# Altium PCB Camera-MT__Pcb.PcbDoc
Units mil, origin at the board's own origin, x right, y up, seen from the top; angles counter-clockwise.
Board outline 984.25 x 1181.1 mil, 2 copper layers (Top Layer, Bottom Layer); 21 components, 25 nets, 100 pads, 36 vias.
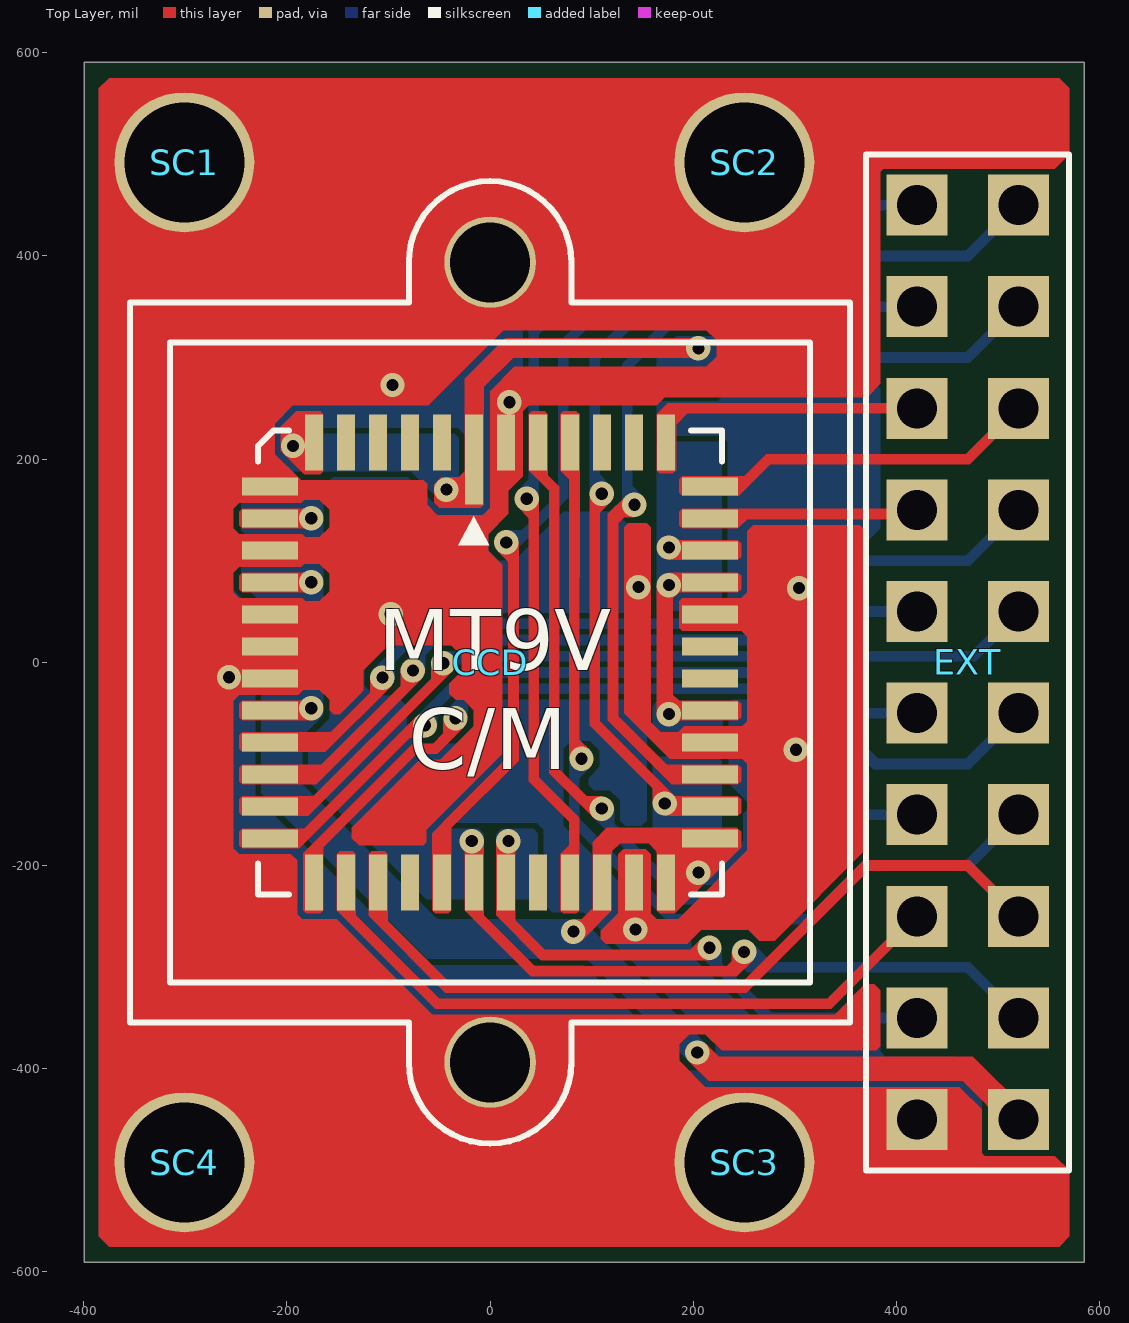
[diagram p0: Top Layer view]
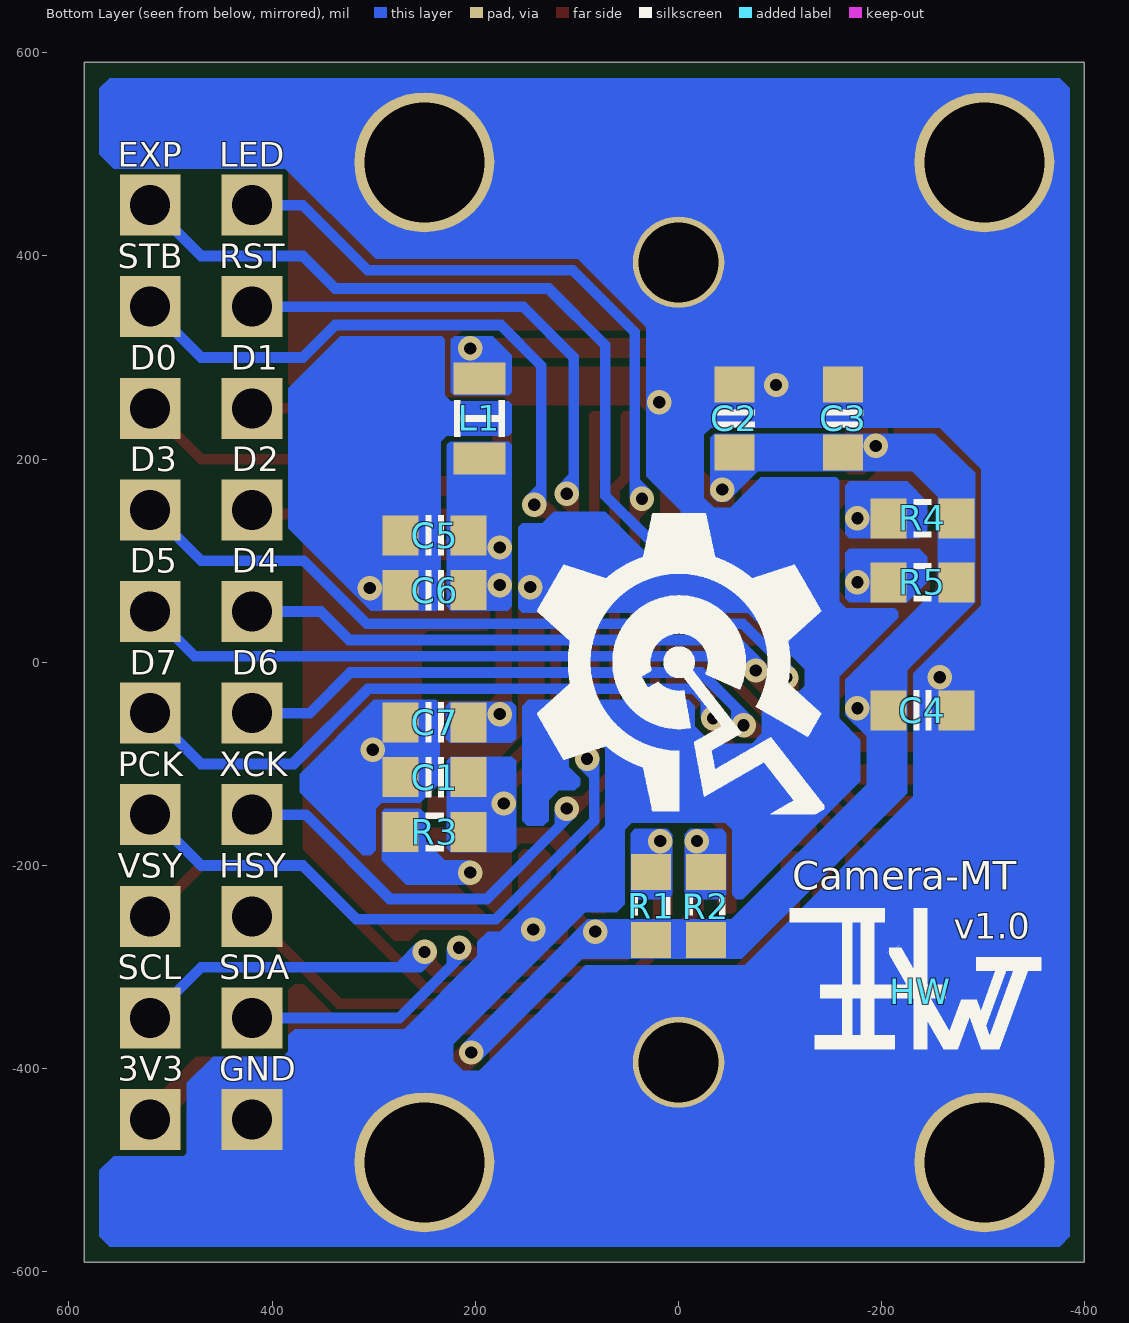
[diagram p1: Bottom Layer view, seen from below]

## Layer stack, top to bottom
Top Solder: solder mask 0.4, Solder Resist, Dk 3.5
Top Layer: signal copper 1.4
Dielectric1: dielectric 12.6, FR-4, Dk 4.8
Bottom Layer: signal copper 1.4
Bottom Solder: solder mask 0.4, Solder Resist, Dk 3.5

## Board outline
-399.37,-590.55 -399.37,590.55 584.88,590.55 584.88,-590.55

## Design rules (kind name [scope] priority, off if disabled: settings)
Clearance ClearancePolygon [InPolygon] p1: gap=8
Clearance [All] p2: gap=6
ComponentClearance [All] p1: gap=0 collisioncheckmode=3 verticalgap=0 showdistances=FALSE
HoleSize [All] p1: absolutevalues=TRUE maxlimit=150 minlimit=1 maxpercent=80.000 minpercent=20.000
HoleToHoleClearance [All] p1: gap=6 allowstackedmicrovias=TRUE
MinimumSolderMaskSliver [All] p1: minsoldermaskwidth=0
PlaneConnect [All] p1: planeconnectstyle=Direct reliefexpansion=20 reliefentries=4 reliefconductorwidth=10 reliefairgap=10
PolygonConnect [All] p1: connectstyle=Direct reliefconductorwidth=10 reliefentries=4 polygonreliefangle="90 Angle" airgapwidth=10
RoutingVias [All] p1: holewidth=12 width=24 viastyle="Through Hole" minholewidth=12 minwidth=20 maxholewidth=24 maxwidth=50
SilkToSilkClearance [All] p1: silktosilkclearance=0
SilkToSolderMaskClearance [IsPad] p1: minsilkscreentomaskgap=2 clearancetoexposedcopper=TRUE
SolderMaskExpansion [All] p1: expansion=0
Width [All] p1: maxlimit=30 minlimit=6 preferedwidth=10
22 further rules are at their usual default settings.

## Components (designator, comment, footprint, x,y, rotation, side; value= is the part's Value field where it differs from the comment)
C1 "Cap_0603" CAP_0603 240,-113 r180 bottom locked
C2 "Cap_0603" CAP_0603 -55,240 r270 bottom locked
C3 "Cap_0603" CAP_0603 -162,240 r270 bottom locked
C4 "Cap_0603" CAP_0603 -240,-47.24 r0 bottom locked
C5 "Cap_0603" CAP_0603 240,125 r180 bottom locked
C6 "Cap_0603" CAP_0603 240,71 r180 bottom locked
C7 "Cap_0603" CAP_0603 240,-59 r180 bottom locked
CCD "CCD" CCD_LENS_20MM 0,0 r90 top locked
EXT "HDR2X10_180_2.54" HDR2X10_180_2.54 520,-450 r90 top locked
HW "HW" Logo_HW_v2.0 -238,-324 r180 bottom
L1 "Ind_0805" IND_0805 196,240 r90 bottom locked
MT9V "MT9V034" CLCC_48 0,0 r0 top locked
R1 "Res_0603" RES_0603 27,-240 r90 bottom locked
R2 "Res_0603" RES_0603 -27,-240 r90 bottom locked
R3 "Res_0603" RES_0603 240,-167 r0 bottom locked
R4 "Res_0603" RES_0603 -240,141.73 r0 bottom locked
R5 "Res_0603" RES_0603 -240,78.74 r0 bottom locked
SC1 "M3" SCRREW_M3 -300.94,492.13 r0 top locked
SC2 "M3" SCRREW_M3 250.24,492.13 r0 top locked
SC3 "M3" SCRREW_M3 250.24,-492.13 r0 top locked
SC4 "M3" SCRREW_M3 -300.94,-492.13 r0 top locked

## Footprints (in the part's own frame and the unit in brackets; to place one, negate y for a bottom-side part, rotate by r counter-clockwise, add the part's x,y. Pads: shape width x height; smd on the part's side, far side on the other; paste and mask are expansions set on the pad)
CAP_0603 [mm] "Chip Capacitor, Body 1.6x0.8mm, 0603, IPC Medium Density"
  rect 0.9x1 smd: 1(-0.85,0) 2(0.85,0)
  Top Layer pour cut-out: -0.4,0.6 0.4,0.6 0.4,-0.6 -0.4,-0.6
  silkscreen extent -0.23,-0.51 0.23,0.51, body extent -0.8,-0.4 0.8,0.4, height 0.92
CCD_LENS_20MM [mil]
  round 90 hole 78.74: 0(-393.7,0) 0(393.7,0)
  silkscreen extent -474,-354 474,354
CLCC_48 [mm] "LCC, 48-Pins, Body 11.43x11.43mmx2.30mm, Pitch 0.80mm, IPC Medium Density"
  rect 0.45x2.25 smd: 1(-0.4,5.075)
  rect 0.45x1.4 smd: 2(-1.2,5.5) 3(-2,5.5) 4(-2.8,5.5) 5(-3.6,5.5) 6(-4.4,5.5) 19(-4.4,-5.5) 20(-3.6,-5.5) 21(-2.8,-5.5) 22(-2,-5.5) 23(-1.2,-5.5) 24(-0.4,-5.5) 25(0.4,-5.5) 26(1.2,-5.5) 27(2,-5.5) 28(2.8,-5.5) 29(3.6,-5.5) 30(4.4,-5.5) 43(4.4,5.5) 44(3.6,5.5) 45(2.8,5.5) 46(2,5.5) 47(1.2,5.5) 48(0.4,5.5)
  rect 1.4x0.45 smd: 7(-5.5,4.4) 8(-5.5,3.6) 9(-5.5,2.8) 10(-5.5,2) 11(-5.5,1.2) 12(-5.5,0.4) 13(-5.5,-0.4) 14(-5.5,-1.2) 15(-5.5,-2) 16(-5.5,-2.8) 17(-5.5,-3.6) 18(-5.5,-4.4) 31(5.5,-4.4) 32(5.5,-3.6) 33(5.5,-2.8) 34(5.5,-2) 35(5.5,-1.2) 36(5.5,-0.4) 37(5.5,0.4) 38(5.5,1.2) 39(5.5,2) 40(5.5,2.8) 41(5.5,3.6) 42(5.5,4.4)
  silkscreen extent -5.8,-5.8 5.8,5.8, body extent -6.35,-6.35 6.35,6.35, height 2.02
HDR2X10_180_2.54 [mil] "Connector; Header; 2x2 Position"
  rect 60x60 hole 39.37: 1(0,0) 2(0,100) 3(100,0) 4(100,100) 5(200,0) 6(200,100) 7(300,0) 8(300,100) 9(400,0) 10(400,100) 11(500,0) 12(500,100) 13(600,0) 14(600,100) 15(700,0) 16(700,100) 17(800,0) 18(800,100) 19(900,0) 20(900,100)
  silkscreen extent -50,-50 950,150, body extent -50,-50 950,150, height 298
IND_0805 [mm] "Ferrite Bead Chip, Body 2.0x1.2mm, 0805, IPC Medium Density"
  rect 0.8x1.3 smd: 1(-1,0) 2(1,0)
  Top Layer pour cut-out: -0.6,0.75 0.6,0.75 0.6,-0.75 -0.6,-0.75
  silkscreen extent -0.46,-0.64 0.46,0.64, body extent -1,-0.6 1,0.6, height 1.05
Logo_HW_v2.0 [mil]
  silkscreen extent -129,-57 119,82
RES_0603 [mm]
  rect 0.9x1 smd: 1(-0.85,0) 2(0.85,0)
  Top Layer pour cut-out: -0.4,0.6 0.4,0.6 0.4,-0.6 -0.4,-0.6
  silkscreen extent -0.23,-0.48 0.23,0.48, body extent -0.8,-0.4 0.8,0.4, height 0.5
SCRREW_M3 [mm]
  round 3.5 hole 3 mask+0: 0(0,0)

## Part data
C1 C2 C3 C4 C5 C6 C7: "Capacitor"
CCD: library part lensCCD_20
EXT: "Header"
HW: "Logo"
L1: "Inductor"
MT9V: "CMOS"
R1 R2 R3 R4 R5: "Resistor"
SC1 SC2 SC3 SC4: library part Screw_M3, "Screw"

## Via types
v1: diameter 24, hole 12, Top Layer to Bottom Layer, 36 vias

## Nets (pads, with @x,y where several pads share a name; then routed paths per layer and width w, separated by ;. In a path a pad name is that pad's centre, name@x,y a point inside that pad or via, vN(x,y) a via of type N, cw(c..) or ccw(c..) an arc to the next point about the centre after c; other vN are vias at no path point)
3V3: C2.2 C3.2 C4.2 EXT.1 L1.2 MT9V.1 MT9V.6 MT9V.14 MT9V.28 MT9V.30 MT9V.31 R1.1 R2.1 R3.2 R4.1 R5.1 | length 1066.8
  Top Layer w10: v1@-195,206.53 -183.23,206.53 ; v1@-37,171 MT9V.1@-15.75,171 ; MT9V.28 110.24,-186.76 124,-173 MT9V.31@216.54,-173
  Top Layer w17: MT9V.14 v1@-176,-47.24
  Top Layer w18: MT9V.1@-15.75,171 -15.75,274.25 19,309 v1(205,309)
  Top Layer w20: v1(204,-384) 220,-400 470,-400 EXT.1
  Bottom Layer w20: v1@84,-264 v1(204,-384)
  other v1: 82,-265 205,-207 -176,-45.24 -43,170 -194,213
3V3A: C5.2 C6.2 C7.2 L1.1 MT9V.35 MT9V.39 MT9V.40 | length 121.6
  Top Layer w17: v1@176,-47.24 MT9V.35 ; v1@176,78.74 MT9V.39 ; v1@176,110.24 MT9V.40
  other v1: 176,-51 176,76 176,113
D0: MT9V.45
D1: MT9V.44
D2: EXT.16 MT9V.43 | length 253.3
  Top Layer w10: MT9V.43@173.23,234.23 189,250 EXT.16
D3: EXT.15 MT9V.42 | length 335.3
  Top Layer w10: MT9V.42 221.31,178 252,178 274,200 470,200 EXT.15
D4: EXT.14 MT9V.41 | length 203.5
  Top Layer w10: MT9V.41@216.54,146 EXT.14@420,146
D5: EXT.13 MT9V.15 | length 843
  Top Layer w10: MT9V.15 -159.74,-78.74 -106,-25 v1(-106,-15)
  Bottom Layer w10: v1(-106,-15) -106,-5 -63,38 307,38 369,100 470,100 EXT.13
D6: EXT.12 MT9V.16 | length 714.6
  Top Layer w10: MT9V.16 -168.24,-110.24 -76,-18 v1(-76,-8)
  Bottom Layer w10: v1(-76,-8) -76,2 -56,22 324,22 352,50 EXT.12
D7: EXT.11 MT9V.17 | length 821.8
  Top Layer w10: MT9V.17 -176.73,-141.73 -46,-11 v1(-46,-1)
  Bottom Layer w10: v1(-46,-1) -39,6 476,6 EXT.11
D8: EXT.10 MT9V.18 | length 726.6
  Top Layer w10: MT9V.18 -185.23,-173.23 -74,-62 v1(-64,-62)
  Bottom Layer w10: v1(-64,-62) -64,-52 -22,-10 323,-10 363,-50 EXT.10
D9: EXT.9 MT9V.19 | length 854.2
  Top Layer w10: MT9V.19 -173.23,-184.23 -74,-85 -54,-85 -34,-65 v1(-34,-55)
  Bottom Layer w10: v1(-34,-55) -34,-45 -15,-26 305.44,-26 379.44,-100 470,-100 EXT.9
EXP: EXT.19 MT9V.23 | length 1090.5
  Top Layer w10: MT9V.23@-43,-217 -43,-161 23,-95 23,111 v1(16,118)
  Bottom Layer w10: v1@21,113 72,164 72,312 128,368 338,368 370,400 470,400 EXT.19
GND: C1.1 C2.1 C3.1 C4.1 C5.1 C6.1 C7.1 CCD.0 EXT.2 MT9V.7 MT9V.9 MT9V.11 MT9V.12 MT9V.13 MT9V.29 MT9V.34 MT9V.38 MT9V.48 SC1.0 SC2.0 SC3.0 SC4.0 | length 3374
  Top Layer w10: MT9V.11 -97.76,47.24 11,156 MT9V.48@11,217 ; v1(146,74) 146,-54 170.74,-78.74 MT9V.34
  Top Layer w17: -300.7,-15.75 MT9V.13 ; -300.7,15.75 MT9V.12 ; -300.7,47.24 MT9V.11 ; -300.7,110.24 MT9V.9 ; -300.7,173.23 MT9V.7
  Top Layer w20: 0,-492 CCD.0@0,-393.7 ; CCD.0@0,393.7 0,492 ; SC3.0 SC4.0 SC1.0 SC2.0
  Bottom Layer w10: SC3.0@292.36,-450 EXT.2
  other v1: 143,-263 301,-86 -257,-14.75 -97.76,47.49 304,73 19,256 -96,273
HSYNC: EXT.6 MT9V.20 | length 664.3
  Top Layer w10: MT9V.20 -141.73,-246.27 -52,-336 334,-336 EXT.6
LED: EXT.20 MT9V.27 | length 912.3
  Top Layer w10: 43,86 43,-115 83,-155 MT9V.27@83,-216
  Bottom Layer w10: v1@43,160 43,325 104,386 306,386 370,450 EXT.20
  other v1: 36,161
NetMT9V_8: MT9V.8 R4.2 | length 40.5
  Top Layer w17: MT9V.8 v1(-176,141.73)
NetMT9V_10: MT9V.10 R5.2 | length 40.5
  Top Layer w17: MT9V.10 v1(-176,78.74)
PCLK: EXT.7 MT9V.46 | length 897
  Top Layer w10: MT9V.46 83,212.28 83,-88 v1(90,-95)
  Bottom Layer w10: v1@83,-95 83,-156 180,-253 317,-253 370,-200 470,-200 EXT.7
RST: C1.2 EXT.18 MT9V.32 R3.1 | length 845.5
  Top Layer w10: v1@103,166 103,-60 185.73,-142.73
  Top Layer w16: 185.73,-142.73 MT9V.32@216.54,-142.73
  Bottom Layer w10: v1@103,166 103,300 153,350 EXT.18
  other v1: 172,-139 110,166
SCL: EXT.3 MT9V.24 R2.2 | length 660.6
  Top Layer w10: MT9V.24 -15.75,-246.25 42,-304 241,-304 v1@255,-290
  Top Layer w17: MT9V.24 v1@-15.75,-176
  Bottom Layer w10: v1@255,-290 265,-300 470,-300 EXT.3
  other v1: 250,-285 -18,-176
SDA: EXT.4 MT9V.25 R1.2 | length 526.5
  Top Layer w10: MT9V.25 15.75,-251.75 52,-288 v1@216,-288
  Top Layer w17: MT9V.25 v1@15.75,-176
  Bottom Layer w10: v1@211,-286 275,-350 EXT.4
  other v1: 216,-281 18,-176
STB: EXT.17 MT9V.33 | length 914.3
  Top Layer w10: v1(142,155) 134,155 121,142 121,-55 176.24,-110.24 MT9V.33
  Bottom Layer w10: v1@135,155 135,292 175,332 338,332 370,300 470,300 EXT.17
VSYNC: EXT.5 MT9V.21 | length 764.1
  Top Layer w10: MT9V.21 -110.24,-251.76 -42,-320 250,-320 370,-200 470,-200 EXT.5
XCLK: EXT.8 MT9V.47 | length 773.6
  Top Layer w10: MT9V.47 47.24,186.76 63,171 63,-107 v1@105,-149
  Bottom Layer w10: v1@105,-149 189,-233 283.56,-233 366.56,-150 EXT.8
  other v1: 110,-144
pads on no net: MT9V.2 MT9V.3 MT9V.4 MT9V.5 MT9V.22 MT9V.26 MT9V.36 MT9V.37

## Other copper
Top Layer:
  region net 3V3: -164,244 -167,247 -191,247 -206,232 -206,208 -183,185 -167,185 -164,188
  region net D5: -106,-15 -118.02,-15 -118,-30 -157,-69 -244,-69 -247,-72 -247,-85 -244,-88 -162,-88 -97.5,-23.5
  region net D6: -76,-8 -88,-8 -88,-23 -166,-101 -244,-101 -247,-104 -247,-117 -244,-120 -171,-120 -67.5,-16.5
  region net D7: -46,-1 -58,-1 -58,-16 -174,-132 -244,-132 -247,-135 -247,-148 -244,-151 -179,-151 -37.5,-9.5
  region net D8: -64,-62 -72.5,-53.5 -183,-164 -244,-164 -247,-167 -247,-180 -244,-183 -188,-183 -79,-74 -64,-74
  region net D9: -34,-55 -46,-55 -46,-70 -56,-80 -76,-80 -184,-188 -184,-244 -181,-247 -167,-247 -164,-244 -164,-182 -72,-90 -52,-90 -25.5,-63.5
  region net 3V3: -25,279 15,319 205,319 205,300 23,300 -6,271 -6,155 -9,152 -50,152 -55,157 -55,175 -48,182 -31,182 -25,188
  region net GND: 0,245 32,245 32,183 18,169 18,146 -89.13,38.87 -101.13,50.87 0,152
  region net 3V3: 212.5,-375.5 225,-388 475,-388 528.5,-441.5 511.5,-458.5 465,-412 215,-412 195.5,-392.5
  region net GND: 556,486 570,500 570,565 560,575 -375,575 -385,565 -385,-565 -375,-575 560,-575 570,-565 570,-500 556,-486 487,-486 484,-483 484,-440 462,-418 212,-418 186,-392 186,-376 196,-366 212,-366 228,-382 380,-382 384,-378 384,-323 378,-317 369,-317 339,-347 -57,-347 -151,-253 -185,-253 -190,-248 -190,-195 -196,-189 -247,-189 -253,-183 -253,-38 -247,-32 -189,-32 -188,-31 -188,63 -247,63 -253,69 -253,88 -247,94 -188,94 -188,126 -247,126 -253,132 -253,151 -247,157 -188,157 -188,181 -212,205 -212,235 -194,253 -61,253 13,327 213,327 223,317 223,301 213,291 24,291 0,267 0,152 -7,145 -52,145 -62,155 -62,175.71 -65.83,179 -185.65,179 -188,181 -188,157 -186,157 -183,160 -168,160 -158,150 -158,133 -168,123 -182,123 -185,126 -188,126 -188,94 -186,94 -183,97 -168,97 -158,87 -158,70 -168,60 -182,60 -185,63 -188,63 -188,-31 -184,-27 -168,-27 -158,-37 -158,-47 -154,-51 -148,-51 -125,-28 -125,-8 -100,17 -38,17 -28,7 -28,-9 -40,-21 -40,-31 -34,-37 -26,-37 -16,-47 -16,-63 -49,-96 -69,-96 -136,-163 -136,-173 -129,-180 -66,-180 -63,-177 -63,-165 12,-90 12,96 -2,110 -2,126 18,146 18,169 32,183 32,247 38,253 164,253 172,261 371,261 384,274 384,483 387,486
  region net 3V3A: 244,69 186,69 180,63 180,-32 186,-38 244,-38 247,-41 247,-54 244,-57 187,-57 184.5,-59.5 176,-51 164,-51 164,76 176,76 176,88 244,88 247,85 247,72
  region net GND: 248,-63 253,-58 253,25 247,31 189,31 186,34 186,60 189,63 247,63 253,69 253,129 259,135 364,135 370,129 370,-184 280,-274 265,-274 254,-263 208,-263 194,-277 114,-277 109,-272 109,-264 126,-247 126,-189 131,-184 153,-184 158,-189 158,-247 164,-253 185,-253 253,-185 253,-100 248,-95 177,-95 132,-50 132,133 136,137 154,137 158,133 158,-59 168,-69 185,-69 191,-63
  region net VSYNC: -100.5,-189 -100.5,-254.5 -40,-315 248,-315 368,-195 472,-195 523.5,-246.5 516.5,-253.5 468,-205 372,-205 252,-325 -44,-325 -119.5,-249.5 -119.5,-189 -116.5,-186 -103.5,-186
  region net HSYNC: -132,-189 -132,-249 -50,-331 332,-331 416.5,-246.5 423.5,-253.5 336,-341 -54,-341 -151,-244 -151,-189 -148,-186 -135,-186
  region net SDA: 25,-186.5 25,-254 54,-283 197,-283 207.5,-272.5 216,-281 216,-293 50,-293 6,-249 6,-176 18,-176 26.4,-184.4
  region net SCL: -6,-176 -6,-249 44,-299 233,-299 238,-294 238,-285 250,-285 258.5,-293.5 243,-309 40,-309 -25,-244 -25,-186 -26.5,-184.5 -18,-176
  region net STB: 244,-120 179,-120 116,-57 116,146 133.5,163.5 142,155 142,143 132,143 126,137 126,-53 174,-101 244,-101 247,-104 247,-117
  region net RST: 244,-151 172,-151 172,-139 160,-139 160,-124 98,-62 98,166 110,166 118.5,157.5 108,147 108,-58 182,-132 244,-132 247,-135 247,-148
  region net D4: 189,151 420,151 420,141 253,141 244,132 189,132 186,135 186,148
  region net D3: 189,183 250,183 272,205 468,205 516.5,253.5 523.5,246.5 472,195 276,195 245,164 189,164 186,167 186,180
  region net D2: 164,189 164,244 175,255 420,255 420,245 194,245 183,234 183,189 180,186 167,186
  region net PCLK: 88.07,243.93 88,-76 98.5,-86.5 90,-95 78,-95 78,180 69.07,188.93 69.07,243.93 72.14,247 85,247
  region net XCLK: 57,244 57,184 68,173 68,-105 95,-132 110,-132 110,-144 101.5,-152.5 58,-109 58,169 38,189 38,244 41,247 54,247
  region net 3V3: 247,-182 182,-247 167,-247 164,-244 164,-186 156,-178 128,-178 120,-186 120,-244 90,-274 82,-274 82,-253 90,-253 101,-242 101,-177 115,-163 168,-163 243,-163 247,-167
  region net LED: 69,-244 69.05,-188.95 78,-180 78,-157 38,-117 38,142 27.5,152.5 36,161 48,161 48,-113 88,-153 88,-244 85,-247 72,-247
  region net EXP: -57,-244 -57,-168 18,-93 18,99 7.5,109.5 16,118 28,118 28,-97 -38,-163 -38,-244 -41,-247 -54,-247
  region net 3V3: -244,-57 -247,-54 -247,-41 -244,-38 -176,-38 -176,-57
  region net NetMT9V_10: -244,69 -247,72 -247,85 -244,88 -176,87.98 -176,69
  region net NetMT9V_8: -244,132 -247,135 -247,148 -244,151 -176,151 -176,132
  region net 3V3A: 244,120 247,117 247,104 244,101 176,101 176,113 184.5,121.5 186,120
Bottom Layer:
  region net EXP: 16,118 24.5,109.5 77,162 77,310 130,363 340,363 372,395 472,395 523.5,446.5 516.5,453.5 468,405 368,405 336,373 126,373 67,314 67,166 31,130 16,130
  region net LED: 36,161 48,161 48,323 106,381 308,381 372,445 420,445 420,455 368,455 304,391 102,391 38,327 38,180 27.5,169.5
  region net RST: 110,166 98,166 98,302 151,355 420,355 420,345 155,345 108,298 108,185 118.5,174.5
  region net STB: 142,155 130,155 130,294 173,337 340,337 372,305 468,305 516.5,353.5 523.5,346.5 472,295 368,295 336,327 177,327 140,290 140,174 150.5,163.5
  region net SCL: 258.49,-276.51 277,-295 472,-295 523.5,-346.5 516.5,-353.5 468,-305 253,-305 241.5,-293.5
  region net SDA: 216,-281 228,-281 228,-296 277,-345 420,-345 420,-355 273,-355 207.5,-289.5
  region net XCLK: 110,-144 101.5,-152.5 187,-238 286,-238 369,-155 420,-155 420,-145 365,-145 282,-228 191,-228 122,-159 122,-144
  region net PCLK: 90,-95 78,-95 78,-158 178,-258 319,-258 372,-205 472,-205 523.5,-153.5 516.5,-146.5 468,-195 368,-195 315,-248 182,-248 88,-154 88,-114 98.5,-103.5
  region net D5: -106,-15 -94,-15 -94,0 -61,33 309,33 371,95 472,95 523.5,146.5 516.5,153.5 468,105 367,105 305,43 -65,43 -114.5,-6.5
  region net D6: -76,-8 -64,-8 -64,7 -54,17 326,17 354,45 420,45 420,55 350,55 322,27 -58,27 -84.5,0.5
  region net D8: -64,-62 -52,-62 -52,-47 -20,-15 321,-15 361,-55 420,-55 420,-45 365,-45 325,-5 -24,-5 -72.5,-53.5
  region net D7: -46,-1 -37.5,-9.5 -27.03,1 478,1 523.5,46.5 516.5,53.5 474,11 -46,11
  region net D9: -34,-55 -22,-55 -22,-40 -13,-31 303,-31 377,-105 472,-105 523.5,-53.5 516.5,-46.5 468,-95 382,-95 308,-21 -17,-21 -42.5,-46.5
  region net NetMT9V_10: -237,112 -168,112 -164,108 -164,63 -168,59 -225,59 -245,79 -245,104
  region net NetMT9V_8: -225,178 -168,178 -164,174 -164,125.99 -168,121.99 -236.99,121.99 -245,130 -245,158
  region net SCL: -6,-169 -6,-229 -10,-233 -43,-233 -47,-229 -47,-168 -43,-164 -11,-164
  region net SDA: 47,-168 47,-229 43,-233 10,-233 6,-229 6,-169 11,-164 43,-164
  region net 3V3: -78,188 -230,188 -255,163 -255,73.99 -164,-16.99 -164,-52 -185,-73 -185,-120 -52,-253 90,-253 212.5,-375.5 195.5,-392.5 95,-292 -62,-292 -225,-129 -225,-8 -292,59 -292,186.61 -252.33,225 -35,225 -31,221 -31,165 -38,158 -48,158
  region net 3V3A: 167,217 225,217 228,214 228,55 224,51 168,51 164,55 164,214
  region net 3V3A: 225,-79 164,-79 160,-75 160,-43 164,-39 225,-39 229,-43 229,-75
  region net RST: 164,-93 224,-93 228,-97 228,-183 224,-187 164,-187 160,-183 160,-97
  region net 3V3: 254,-144 249,-149 249,-176 230,-195 205,-195 205,-219 268,-219 292,-195 292,-147 289,-144
  region net GND: 239,-37 235,-41 235,-119 254,-138 292,-138 298,-144 298,-185 303,-190 311,-190 373,-128 373,-110 300,-37
  region net 3V3: 221,263 224,266 224,318 221,321 183,321 164,302 164,266 167,263
  region net GND: 238,51 303,51 384,132 384,270 333,321 233,321 230,318 230,263 224,257 167,257 164,254 164,226 167,223 228,223 234,217 234,55
  region net GND: -375,575 560,575 570,565 570,500 556,486 387,486 298,397 99,397 32,330 32,183 -2,149 -2,110 8,100 24,100 72,148 123,148 134,137 154,137 158,133 158,53 154,49 -68,49 -124,-7 -124,-23 -114,-33 -92,-33 -82,-43 -82,-70 -72,-80 -33,-80 -16,-63 -16,-43 -10,-37 148,-37 154,-43 154,-156 149,-161 133,-161 128,-156 128,-136 118,-126 102,-126 97,-121 97,-114 108,-103 108,-87 98,-77 80,-77 72,-85 72,-161 174,-263 109,-263 92,-246 61,-246 53,-238 53,-165 46,-158 -46,-158 -53,-165 -53,-229 -57,-233 -63,-233 -179,-117 -179,-76 -158,-55 -158,-14 -216,44 -216,50 -213,53 -165,53 -158,60 -158,179 -155,182 -81,182 -51,152 -35,152 -25,162 -25,224 -32,231 -257,231 -298,190 -298,56 -231,-11 -231,-132 -65,-298 92,-298 196,-402 212,-402 222,-392 222,-376 109,-263 174,-263 176,-265 188,-265 198,-275 198,-289 270,-361 378,-361 384,-367 384,-383 389,-388 458,-388 484,-414 484,-483 487,-486 556,-486 570,-500 570,-565 560,-575 -375,-575 -385,-565 -385,565

## Silkscreen, mask and mechanical layers (free items; w line width, h text height)
Top Overlay:
  text "C/M" at -80,-105 h60
Bottom Overlay:
  drawing of 3067 lines, arcs and shapes, not listed
  text "LED" at 452,488 h24
  text "EXP" at 552,488 h24
  text "RST" at 452,388 h24
  text "STB" at 552,388 h24
  text "D1" at 441,288 h24
  text "D0" at 540,288 h24
  text "D2" at 440,188 h24
  text "D3" at 540,188 h24
  text "D4" at 440,88 h24
  text "D5" at 540,88 h24
  text "D6" at 440,-12 h24
  text "D7" at 540,-12 h24
  text "XCK" at 452,-112 h24
  text "PCK" at 552,-112 h24
  text "HSY" at 452,-212 h24
  text "VSY" at 552,-212 h24
  text "Camera-MT" at -112,-224 h28
  text "v1.0" at -271,-272 h25
  text "SDA" at 452,-312 h24
  text "SCL" at 552,-312 h24
  text "GND" at 452,-412 h24
  text "3V3" at 552,-412 h24
Mechanical 13:
  the board outline again, w2

## Dimensions
584.88,590.55 to 584.88,-590.55 on Mechanical 13
-300.94,-492.13 to 250.24,-492.13 on Mechanical 13
-300.94,492.13 to -300.94,-492.13 on Mechanical 13
-399.37,590.55 to 584.88,590.55 on Mechanical 13